# Altium PCB PCB_ControlDevBoard_2024-04-22.pcbdoc
Units mm, origin at the board's own origin, x right, y up, seen from the top; angles counter-clockwise.
Board outline 130.65 x 105.65 mm, 2 copper layers (Top Layer, Bottom Layer); 33 components, 67 nets, 152 pads, 4 vias.
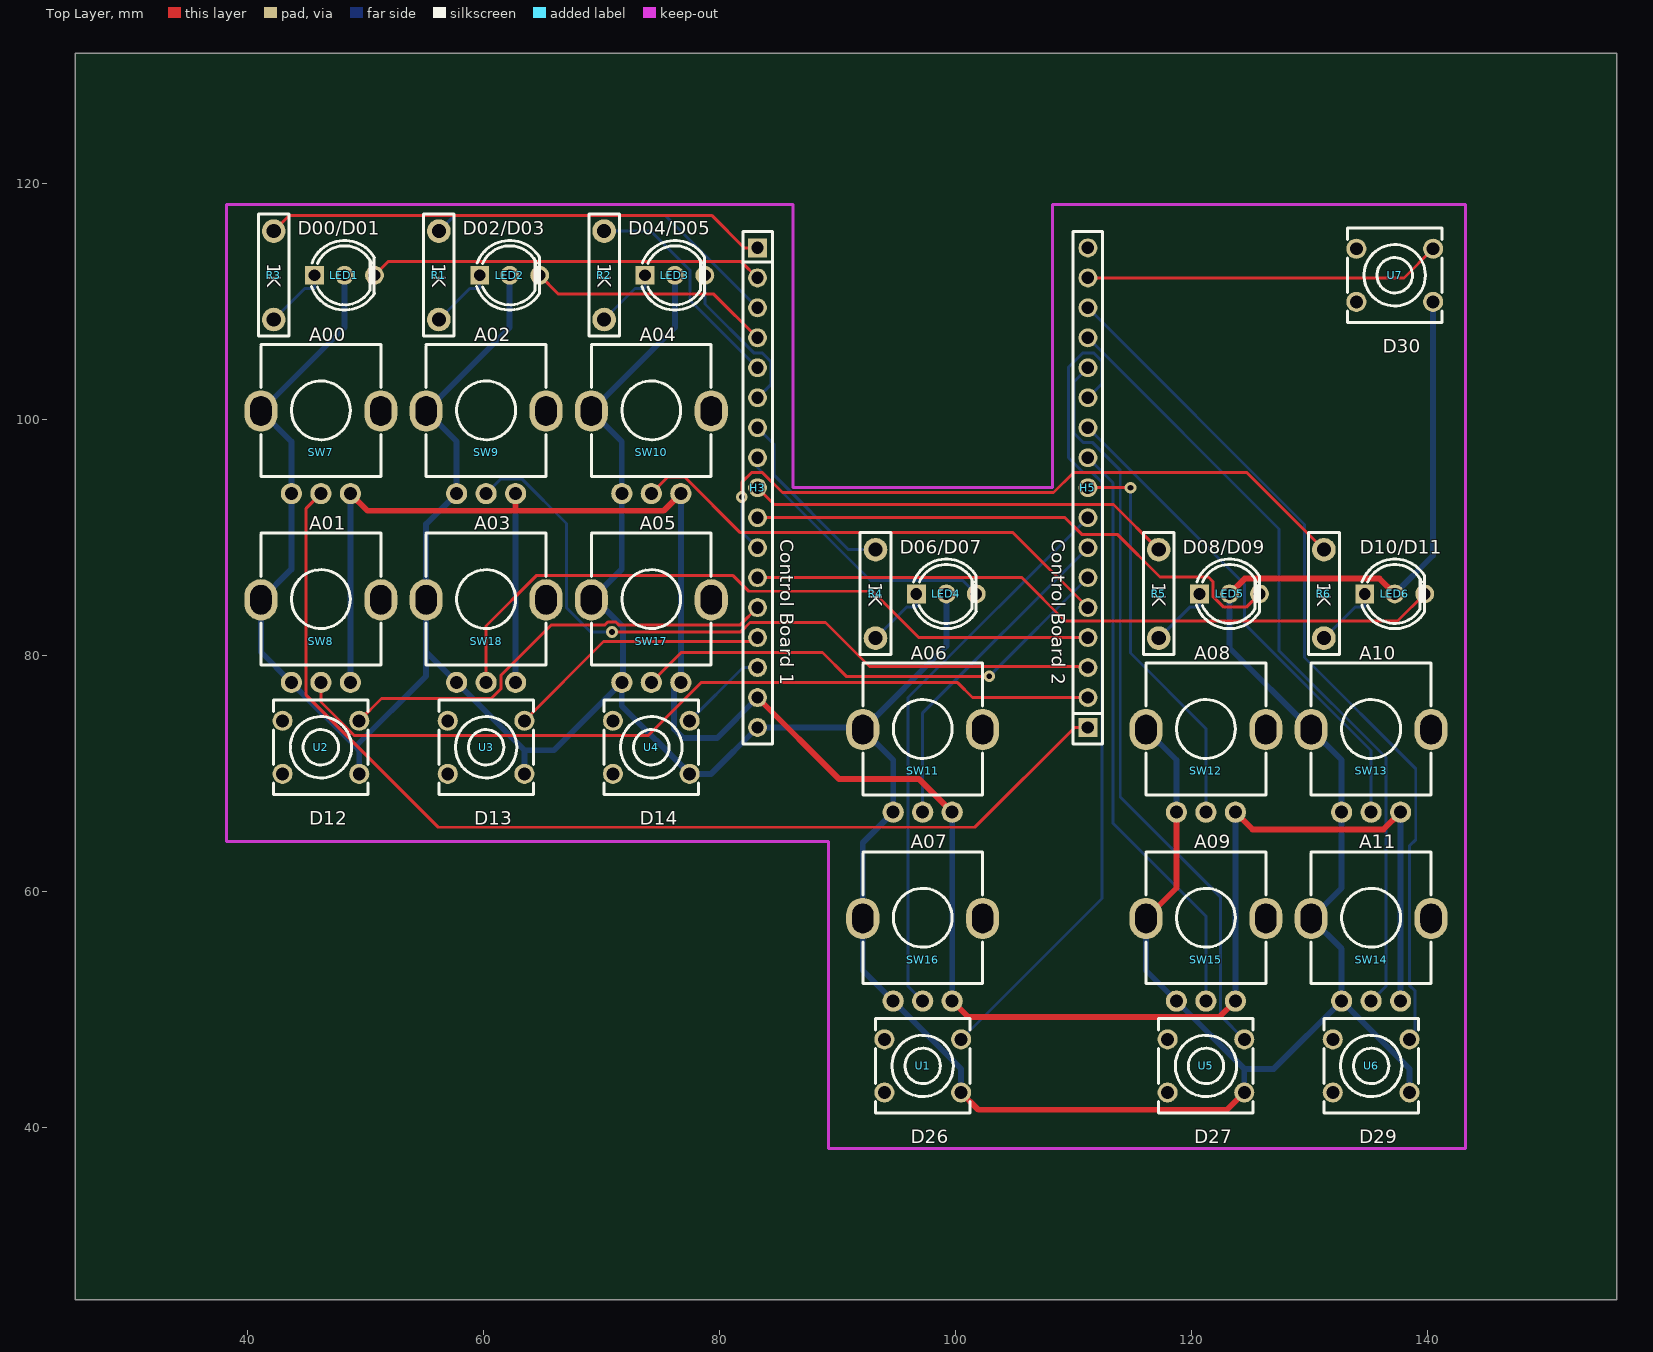
[diagram p0: Top Layer view]
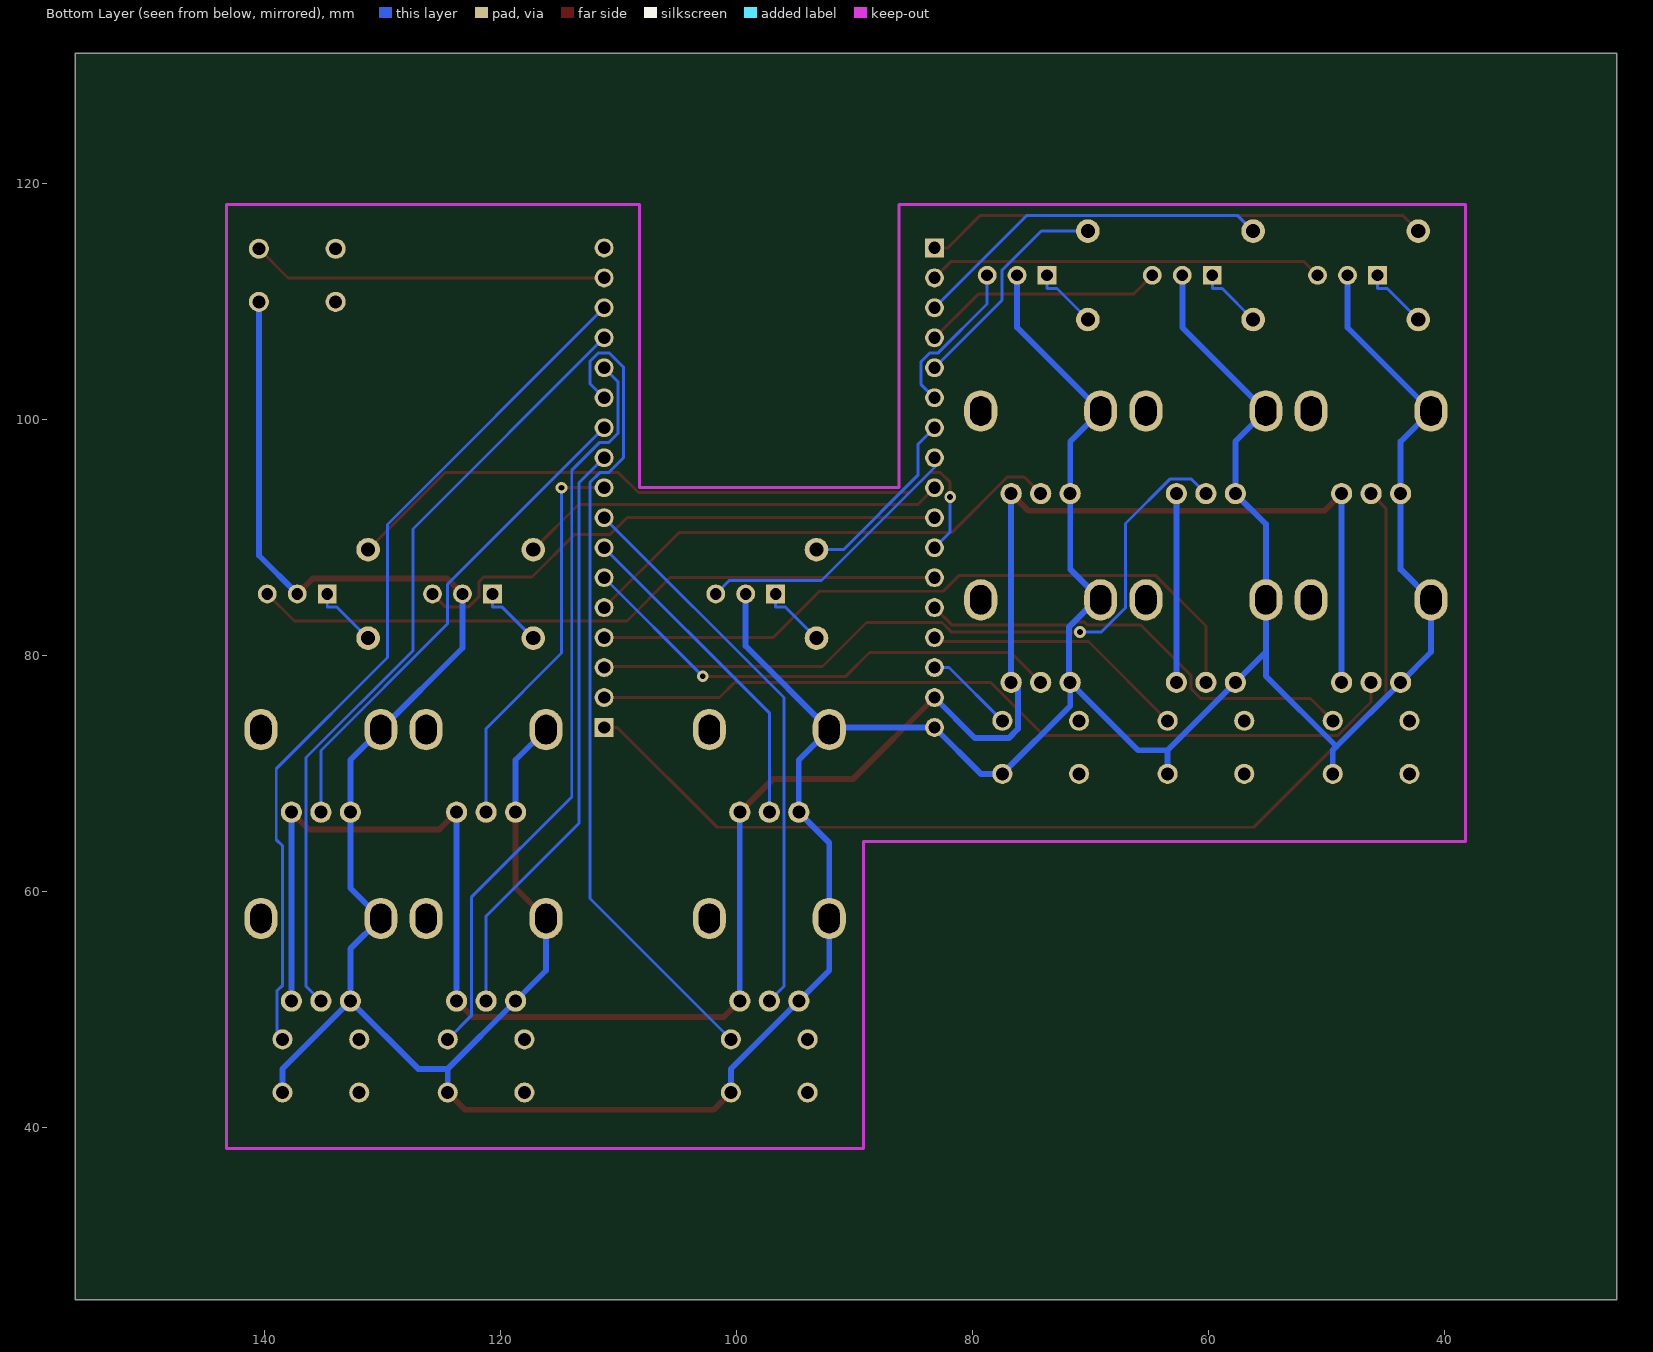
[diagram p1: Bottom Layer view, seen from below]

## Layer stack, top to bottom
Top Solder: solder mask 0.0102, Solder Resist, Dk 3.5
Top Layer: signal copper 0.0356
Dielectric1: dielectric 0.32, FR-4, Dk 4.8
Bottom Layer: signal copper 0.0356
Bottom Solder: solder mask 0.0102, Solder Resist, Dk 3.5

## Board outline
156.053,25.4 25.4,25.4 25.4,131.054 156.053,131.054

## Design rules (kind name [scope] priority, off if disabled: settings)
Clearance [All] p1: gap=0.254 ignorepadtopadclearanceinfootprint=FALSE except(0: Arc-Hole Track-Hole SMDPad-Hole THPad-Hole Via-Hole Fill-Hole Poly-Hole Region-Hole Text-Hole)
PolygonConnect [All] p1: connectstyle=Relief reliefconductorwidth=0.254 reliefentries=4 polygonreliefangle="90 Angle" airgapwidth=0.254
RoutingVias [All] p1: holewidth=0.711 width=1.27 viastyle="Through Hole" minholewidth=0.711 minwidth=1.27 maxholewidth=0.711 maxwidth=1.27
SolderMaskExpansion [All] p1: expansion=0.102 istentingtop=FALSE
Width [All] p1: maxlimit=0.254 minlimit=0.254 preferedwidth=0.254
30 further rules are at their usual default settings.

## Components (designator, comment, footprint, x,y, rotation, side; value= is the part's Value field where it differs from the comment)
H3 "Control Board 1" HDR-TH_17P-P2.54-V-M 83.227,94.226 r270 top
H5 "Control Board 2" HDR-TH_17P-P2.54-V-M 111.227,94.226 r90 top
LED1 "D00/D01" LED-TH_3P-BD5.9-P2.54-BI 48.227,112.226 r0 top
LED2 "D02/D03" LED-TH_3P-BD5.9-P2.54-BI 62.227,112.226 r0 top
LED3 "D04/D05" LED-TH_3P-BD5.9-P2.54-BI 76.227,112.226 r0 top
LED4 "D06/D07" LED-TH_3P-BD5.9-P2.54-BI 99.227,85.226 r0 top
LED5 "D08/D09" LED-TH_3P-BD5.9-P2.54-BI 123.227,85.226 r0 top
LED6 "D10/D11" LED-TH_3P-BD5.9-P2.54-BI 137.227,85.226 r0 top
R1 "1K" PS-RES-16.5*6.42 56.227,112.226 r270 top
R2 "1K" PS-RES-16.5*6.42 70.227,112.226 r270 top
R3 "1K" PS-RES-16.5*6.42 42.227,112.226 r270 top
R4 "1K" PS-RES-16.5*6.42 93.227,85.226 r270 top
R5 "1K" PS-RES-16.5*6.42 117.227,85.226 r270 top
R6 "1K" PS-RES-16.5*6.42 131.227,85.226 r270 top
SW7 "A00" RES-ADJ-TH_RK09D1130C4G 46.227,97.226 r0 top
SW8 "A01" RES-ADJ-TH_RK09D1130C4G 46.227,81.226 r0 top
SW9 "A02" RES-ADJ-TH_RK09D1130C4G 60.227,97.226 r0 top
SW10 "A04" RES-ADJ-TH_RK09D1130C4G 74.227,97.226 r0 top
SW11 "A06" RES-ADJ-TH_RK09D1130C4G 97.227,70.226 r0 top
SW12 "A08" RES-ADJ-TH_RK09D1130C4G 121.227,70.226 r0 top
SW13 "A10" RES-ADJ-TH_RK09D1130C4G 135.227,70.226 r0 top
SW14 "A11" RES-ADJ-TH_RK09D1130C4G 135.227,54.226 r0 top
SW15 "A09" RES-ADJ-TH_RK09D1130C4G 121.227,54.226 r0 top
SW16 "A07" RES-ADJ-TH_RK09D1130C4G 97.227,54.226 r0 top
SW17 "A05" RES-ADJ-TH_RK09D1130C4G 74.227,81.226 r0 top
SW18 "A03" RES-ADJ-TH_RK09D1130C4G 60.227,81.226 r0 top
U1 "D26" SW-TH_4P-L8.0-W8.0-P6.50-LS4.5 97.227,45.226 r0 top
U2 "D12" SW-TH_4P-L8.0-W8.0-P6.50-LS4.5 46.227,72.226 r0 top
U3 "D13" SW-TH_4P-L8.0-W8.0-P6.50-LS4.5 60.227,72.226 r0 top
U4 "D14" SW-TH_4P-L8.0-W8.0-P6.50-LS4.5 74.227,72.226 r0 top
U5 "D27" SW-TH_4P-L8.0-W8.0-P6.50-LS4.5 121.227,45.226 r0 top
U6 "D29" SW-TH_4P-L8.0-W8.0-P6.50-LS4.5 135.227,45.226 r0 top
U7 "D30" SW-TH_4P-L8.0-W8.0-P6.50-LS4.5 137.227,112.226 r0 top

## Footprints (in the part's own frame and the unit in brackets; to place one, negate y for a bottom-side part, rotate by r counter-clockwise, add the part's x,y. Pads: shape width x height; smd on the part's side, far side on the other; paste and mask are expansions set on the pad)
HDR-TH_17P-P2.54-V-M [mm]
  rect 1.6x1.6 hole 1.05 paste+0 mask+0.051: 1(-20.32,0)
  round 1.6 hole 1.05 paste+0 mask+0.051: 2(-17.78,0) 3(-15.24,0) 4(-12.7,0) 5(-10.16,0) 6(-7.62,0) 7(-5.08,0) 8(-2.54,0) 9(0,0) 10(2.54,0) 11(5.08,0) 12(7.62,0) 13(10.16,0) 14(12.7,0) 15(15.24,0) 16(17.78,0) 17(20.32,0)
  silkscreen extent -21.71,-1.25 21.71,1.25
LED-TH_3P-BD5.9-P2.54-BI [mm]
  rect 1.6x1.6 hole 1 paste+0 mask+0.051: 1(-2.54,0)
  round 1.6 hole 1 paste+0 mask+0.051: 2(0,0) 3(2.54,0)
  silkscreen extent -2.79,-2.95 2.54,2.95
PS-RES-16.5*6.42 [mm]
  round 2 hole 1.2 paste+0 mask+0.051: 1(-3.749,0) 2(3.749,0)
  silkscreen extent -5.2,-1.3 5.15,1.3
RES-ADJ-TH_RK09D1130C4G [mm]
  round 1.8 hole 1.1 paste+0 mask+0.05: 1(-2.5,-3.5) 2(0,-3.5) 3(2.5,-3.5)
  oval 2.8x3.5 hole 1.8 slot 2.5 at 90 deg paste+0 mask+0.05: 4(-5.08,3.5) 5(5.08,3.5)
  silkscreen extent -5.08,-2.03 5.08,9.14
SW-TH_4P-L8.0-W8.0-P6.50-LS4.5 [mm]
  round 1.7 hole 1.1 paste+0 mask+0.05: 1(-3.25,2.25) 2(3.25,2.25) 3(-3.25,-2.25) 4(3.25,-2.25)
  silkscreen extent -4,-4 4,4

## Via types
v1: diameter 1, hole 0.5, Top Layer to Bottom Layer, 4 vias

## Nets (pads, with @x,y where several pads share a name; then routed paths per layer and width w, separated by ;. In a path a pad name is that pad's centre, name@x,y a point inside that pad or via, vN(x,y) a via of type N, cw(c..) or ccw(c..) an arc to the next point about the centre after c; other vN are vias at no path point)
3V3A: H3.16 SW7.3 SW8.3 SW9.3 SW10.3 SW11.3 SW12.3 SW13.3 SW14.3 SW15.3 SW16.3 SW17.3 SW18.3 | length 200.5
  Top Layer w0.5: SW7.3 50.179,92.274 62.727,92.274 ; SW9.3 62.727,92.274 ; SW10.3 75.274,92.274 62.727,92.274 ; H3.16 90.144,69.529 96.924,69.529 SW11.3 ; SW16.3 101.084,49.369 122.37,49.369 SW15.3 ; SW12.3 125.182,65.271 136.272,65.271 SW13.3
  Bottom Layer w0.5: SW8.3 SW7.3 ; SW18.3 SW9.3 ; SW10.3 SW17.3 76.147,77.146 76.147,73.789 76.928,73.008 79.788,73.008 H3.16 ; SW16.3 SW11.3 ; SW15.3 SW12.3 ; SW14.3 SW13.3
3V3D: H5.17
A00/D15: H5.1 SW7.2 | length 92
  Top Layer w0.25: SW7.2 44.977,92.476 44.977,76.641 56.167,65.451 101.646,65.451 110.101,73.906 H5.1
A01/D16: H5.2 SW8.2 | length 70.2
  Top Layer w0.25: SW8.2 46.227,76.056 49.068,73.214 73.95,73.214 78.438,77.702 100.192,77.702 101.448,76.446 H5.2
A02/D17: H5.3 SW9.2 | length 63
  Top Layer w0.25: v1(70.885,82.011) 81.81,82.011 82.596,82.796 88.996,82.796 92.722,79.071 111.142,79.071 H5.3
  Bottom Layer w0.25: SW9.2 61.479,94.979 63.239,94.979 67.034,91.184 67.034,84.044 69.067,82.011 v1(70.885,82.011)
A03/D18: H5.4 SW18.2 | length 59.7
  Top Layer w0.25: SW18.2 60.227,82.511 64.519,86.802 81.126,86.802 82.475,85.453 92.964,85.453 96.891,81.526 H5.4
A04/D19: H5.5 SW10.2 | length 42.2
  Top Layer w0.25: SW10.2 75.628,95.128 77.061,95.128 81.772,90.416 104.877,90.416 H5.5
A05/D20: H5.6 SW17.2 | length 42.3
  Top Layer w0.25: SW17.2 76.757,80.256 88.732,80.256 90.744,78.244 v1(102.865,78.244)
  Bottom Layer w0.25: v1(102.865,78.244) H5.6
A06/D21: H5.7 SW11.2 | length 28.2
  Bottom Layer w0.25: SW11.2 97.227,75.146 H5.7
A07/D22: H5.8 SW16.2 | length 47.8
  Bottom Layer w0.25: SW16.2 95.977,51.976 95.977,76.437 H5.8
A08/D23: H5.9 SW12.2 | length 33.7
  Top Layer w0.25: H5.9 v1(114.824,94.226)
  Bottom Layer w0.25: v1(114.824,94.226) 114.824,80.207 121.227,73.805 SW12.2
A09/D24: H5.10 SW15.2 | length 50.2
  Bottom Layer w0.25: H5.10 113.35,94.643 113.35,65.79 121.227,57.914 SW15.2
A10/D25: H5.11 SW13.2 | length 42.5
  Bottom Layer w0.25: H5.11 124.496,86.037 124.496,82.697 135.227,71.966 SW13.2
A11/D28: H5.14 SW14.2 | length 67.2
  Bottom Layer w0.25: H5.14 127.43,90.723 127.43,80.402 136.476,71.355 136.476,51.976 SW14.2
D00: H3.1 R3.1 | length 42.7
  Top Layer w0.25: R3.1 43.556,117.305 79.343,117.305 82.101,114.546 H3.1
D01: H3.2 LED1.3 | length 33.5
  Top Layer w0.25: LED1.3 51.92,113.38 81.854,113.38 H3.2
D02: H3.3 R1.1 | length 30.8
  Bottom Layer w0.25: R1.1 57.562,117.31 75.383,117.31 H3.3
D03: H3.4 LED2.3 | length 20.7
  Top Layer w0.25: LED2.3 66.366,110.627 79.526,110.627 H3.4
D04: H3.5 R2.1 | length 19.3
  Bottom Layer w0.25: R2.1 74.176,115.975 77.497,112.655 77.497,110.116 H3.5
D05: H3.6 LED3.3 | length 13.6
  Bottom Layer w0.25: LED3.3 78.767,109.793 82.904,105.656 83.61,105.656 84.383,104.884 84.383,103.002 H3.6
D06: H3.7 R4.1 | length 15.8
  Bottom Layer w0.25: H3.7 84.64,97.893 84.64,95.275 90.94,88.975 R4.1
D07: H3.8 LED4.3 | length 23.8
  Bottom Layer w0.25: H3.8 83.227,95.935 92.795,86.367 100.626,86.367 LED4.3
D08: H3.9 R5.1 | length 36.2
  Top Layer w0.25: H3.9 84.64,92.813 113.389,92.813 R5.1
D09: H3.10 LED5.3 | length 46.9
  Top Layer w0.25: H3.10 109.282,91.686 110.695,90.273 113.718,90.273 117.334,86.657 121.437,86.657 121.814,86.28 121.814,85.027 122.741,84.1 124.64,84.1 LED5.3
D10: H3.11 R6.1 | length 59.9
  Top Layer w0.25: v1(81.898,93.429) 81.898,94.684 82.711,95.496 83.655,95.496 85.342,93.809 108.31,93.809 109.997,95.496 124.706,95.496 R6.1
  Bottom Layer w0.25: v1(81.898,93.429) 81.898,90.475 H3.11
D11: H3.12 LED6.3 | length 59
  Top Layer w0.25: H3.12 105.621,86.606 109.295,82.932 137.472,82.932 LED6.3
D12: H3.13 U2.2 | length 38.6
  Top Layer w0.25: U2.2 51.37,76.369 60.669,76.369 61.477,77.177 61.477,78.306 65.775,82.604 70.309,82.604 70.543,82.837 71.227,82.837 71.461,82.604 81.764,82.604 H3.13
D13: H3.14 U3.2 | length 22.7
  Top Layer w0.25: U3.2 70.185,81.184 82.885,81.184 H3.14
D14: H3.15 U4.2 | length 7.6
  Bottom Layer w0.25: U4.2 81.987,78.986 H3.15
D26: H5.12 U1.2 | length 70.7
  Bottom Layer w0.25: U1.2@100.477,47.476 112.413,59.412 112.413,94.684 111.601,95.496 110.85,95.496 109.579,96.768 109.579,104.433 110.802,105.656 111.702,105.656 112.406,104.953 112.406,103.025 H5.12
D27: H5.13 U5.2 | length 63.8
  Bottom Layer w0.25: H5.13 110.062,103.222 110.062,98.818 110.809,98.071 111.595,98.071 113.969,95.697 113.969,68.023 122.477,59.515 122.477,49.476 U5.2@124.477,47.476
D29: H5.15 U6.2 | length 74.1
  Bottom Layer w0.25: H5.15 129.584,91.11 129.584,79.84 139.009,70.415 139.009,64.402 138.466,63.859 138.466,52.067 138.957,51.576 138.957,47.956 U6.2@138.477,47.476
D30: H5.16 U7.2 | length 30.3
  Top Layer w0.25: H5.16 138.007,112.006 U7.2
GND: H3.17 LED1.2 LED2.2 LED3.2 LED4.2 LED5.2 LED6.2 SW7.1 SW7.4 SW8.1 SW8.4 SW9.1 SW9.4 SW10.1 SW10.4 SW11.1 SW11.4 SW12.1 SW12.4 SW13.1 SW13.4 SW14.1 SW14.4 SW15.1 SW15.4 SW16.1 SW16.4 SW17.1 SW17.4 SW18.1 SW18.4 U1.4 U2.4 U3.4 U4.4 U5.4 U6.4 U7.4 | length 404.9
  Top Layer w0.5: U1.4 101.94,41.513 123.013,41.513 U5.4 ; SW15.4 118.727,60.306 SW12.1 ; LED5.2 124.516,86.515 135.938,86.515 LED6.2
  Bottom Layer w0.5: LED1.2 48.227,107.806 SW7.4 43.727,98.146 SW7.1 43.727,87.306 SW8.4 41.147,80.306 SW8.1 49.165,72.288 ; U2.4 49.477,71.976 49.165,72.288 ; LED2.2 62.227,107.806 SW9.4 57.727,98.146 SW9.1 55.147,91.146 SW18.4 55.147,80.306 ; U3.4 63.477,71.976 ; LED3.2 76.227,107.806 SW10.4 71.727,98.146 SW10.1 71.727,87.306 SW17.4 69.515,84.726 71.837,82.405 71.837,77.836 SW17.1 ; LED4.2 99.227,80.806 SW11.4 ; U1.4 100.477,44.976 SW16.1 92.147,53.306 SW16.4 92.147,64.146 SW11.1 94.727,71.146 SW11.4 ; SW15.4 116.147,53.306 SW15.1 124.477,44.976 ; SW12.4 118.727,71.146 SW12.1 ; LED5.2 123.227,80.646 SW13.4 132.727,71.146 SW13.1 132.727,60.306 SW14.4 132.727,55.146 SW14.1 ; U5.4 124.477,44.976 ; LED6.2 140.477,88.476 U7.4 ; U6.4 138.477,44.976 SW14.1 ; 49.165,72.288 55.147,78.27 55.147,80.306 ; 55.147,80.306 SW18.1 63.477,71.976 ; 63.477,71.976 65.977,71.976 SW17.1 ; SW17.1 71.727,75.727 U4.4 79.297,69.976 H3.17 91.967,73.906 SW11.4 ; 124.477,44.976 126.977,44.976 SW14.1
LED1_1: LED1.1 R3.2 | length 5.7
  Bottom Layer w0.25: R3.2 44.851,111.101 45.687,111.101 LED1.1
LED3_1: LED3.1 R2.2 | length 5.7
  Bottom Layer w0.25: R2.2 72.851,111.101 73.687,111.101 LED3.1
LED4_1: LED4.1 R4.2 | length 5.7
  Bottom Layer w0.25: R4.2 95.85,84.101 96.687,84.101 LED4.1
LED5_1: LED5.1 R5.2 | length 5.7
  Bottom Layer w0.25: R5.2 119.85,84.101 120.687,84.101 LED5.1
LED6_1: LED6.1 R6.2 | length 5.7
  Bottom Layer w0.25: R6.2 133.85,84.101 134.687,84.101 LED6.1
R1_2: LED2.1 R1.2 | length 5.7
  Bottom Layer w0.25: R1.2 58.851,111.101 59.687,111.101 LED2.1
S$106: 
SW7_5: SW7.5
SW8_5: SW8.5
SW9_5: SW9.5
SW10_5: SW10.5
SW11_5: SW11.5
SW12_5: SW12.5
SW13_5: SW13.5
SW14_5: SW14.5
SW15_5: SW15.5
SW16_5: SW16.5
SW17_5: SW17.5
SW18_5: SW18.5
U1_1: U1.1
U1_3: U1.3
U2_1: U2.1
U2_3: U2.3
U3_1: U3.1
U3_3: U3.3
U4_1: U4.1
U4_3: U4.3
U5_1: U5.1
U5_3: U5.3
U6_1: U6.1
U6_3: U6.3
U7_1: U7.1
U7_3: U7.3